# Altium PCB RT_SUPER_MK90.PCBdoc (part 2 of 3)
Units mil, origin at the board's own origin, x right, y up, seen from the top; angles counter-clockwise.
Board outline 1499.94 x 1499.94 mil, 4 copper layers (Top Layer, GND, PWR, Bottom Layer), stack 39.556 mil thick; 179 components, 119 nets, 506 pads, 207 vias.
Unrouted connection lines stored in the file: 7.
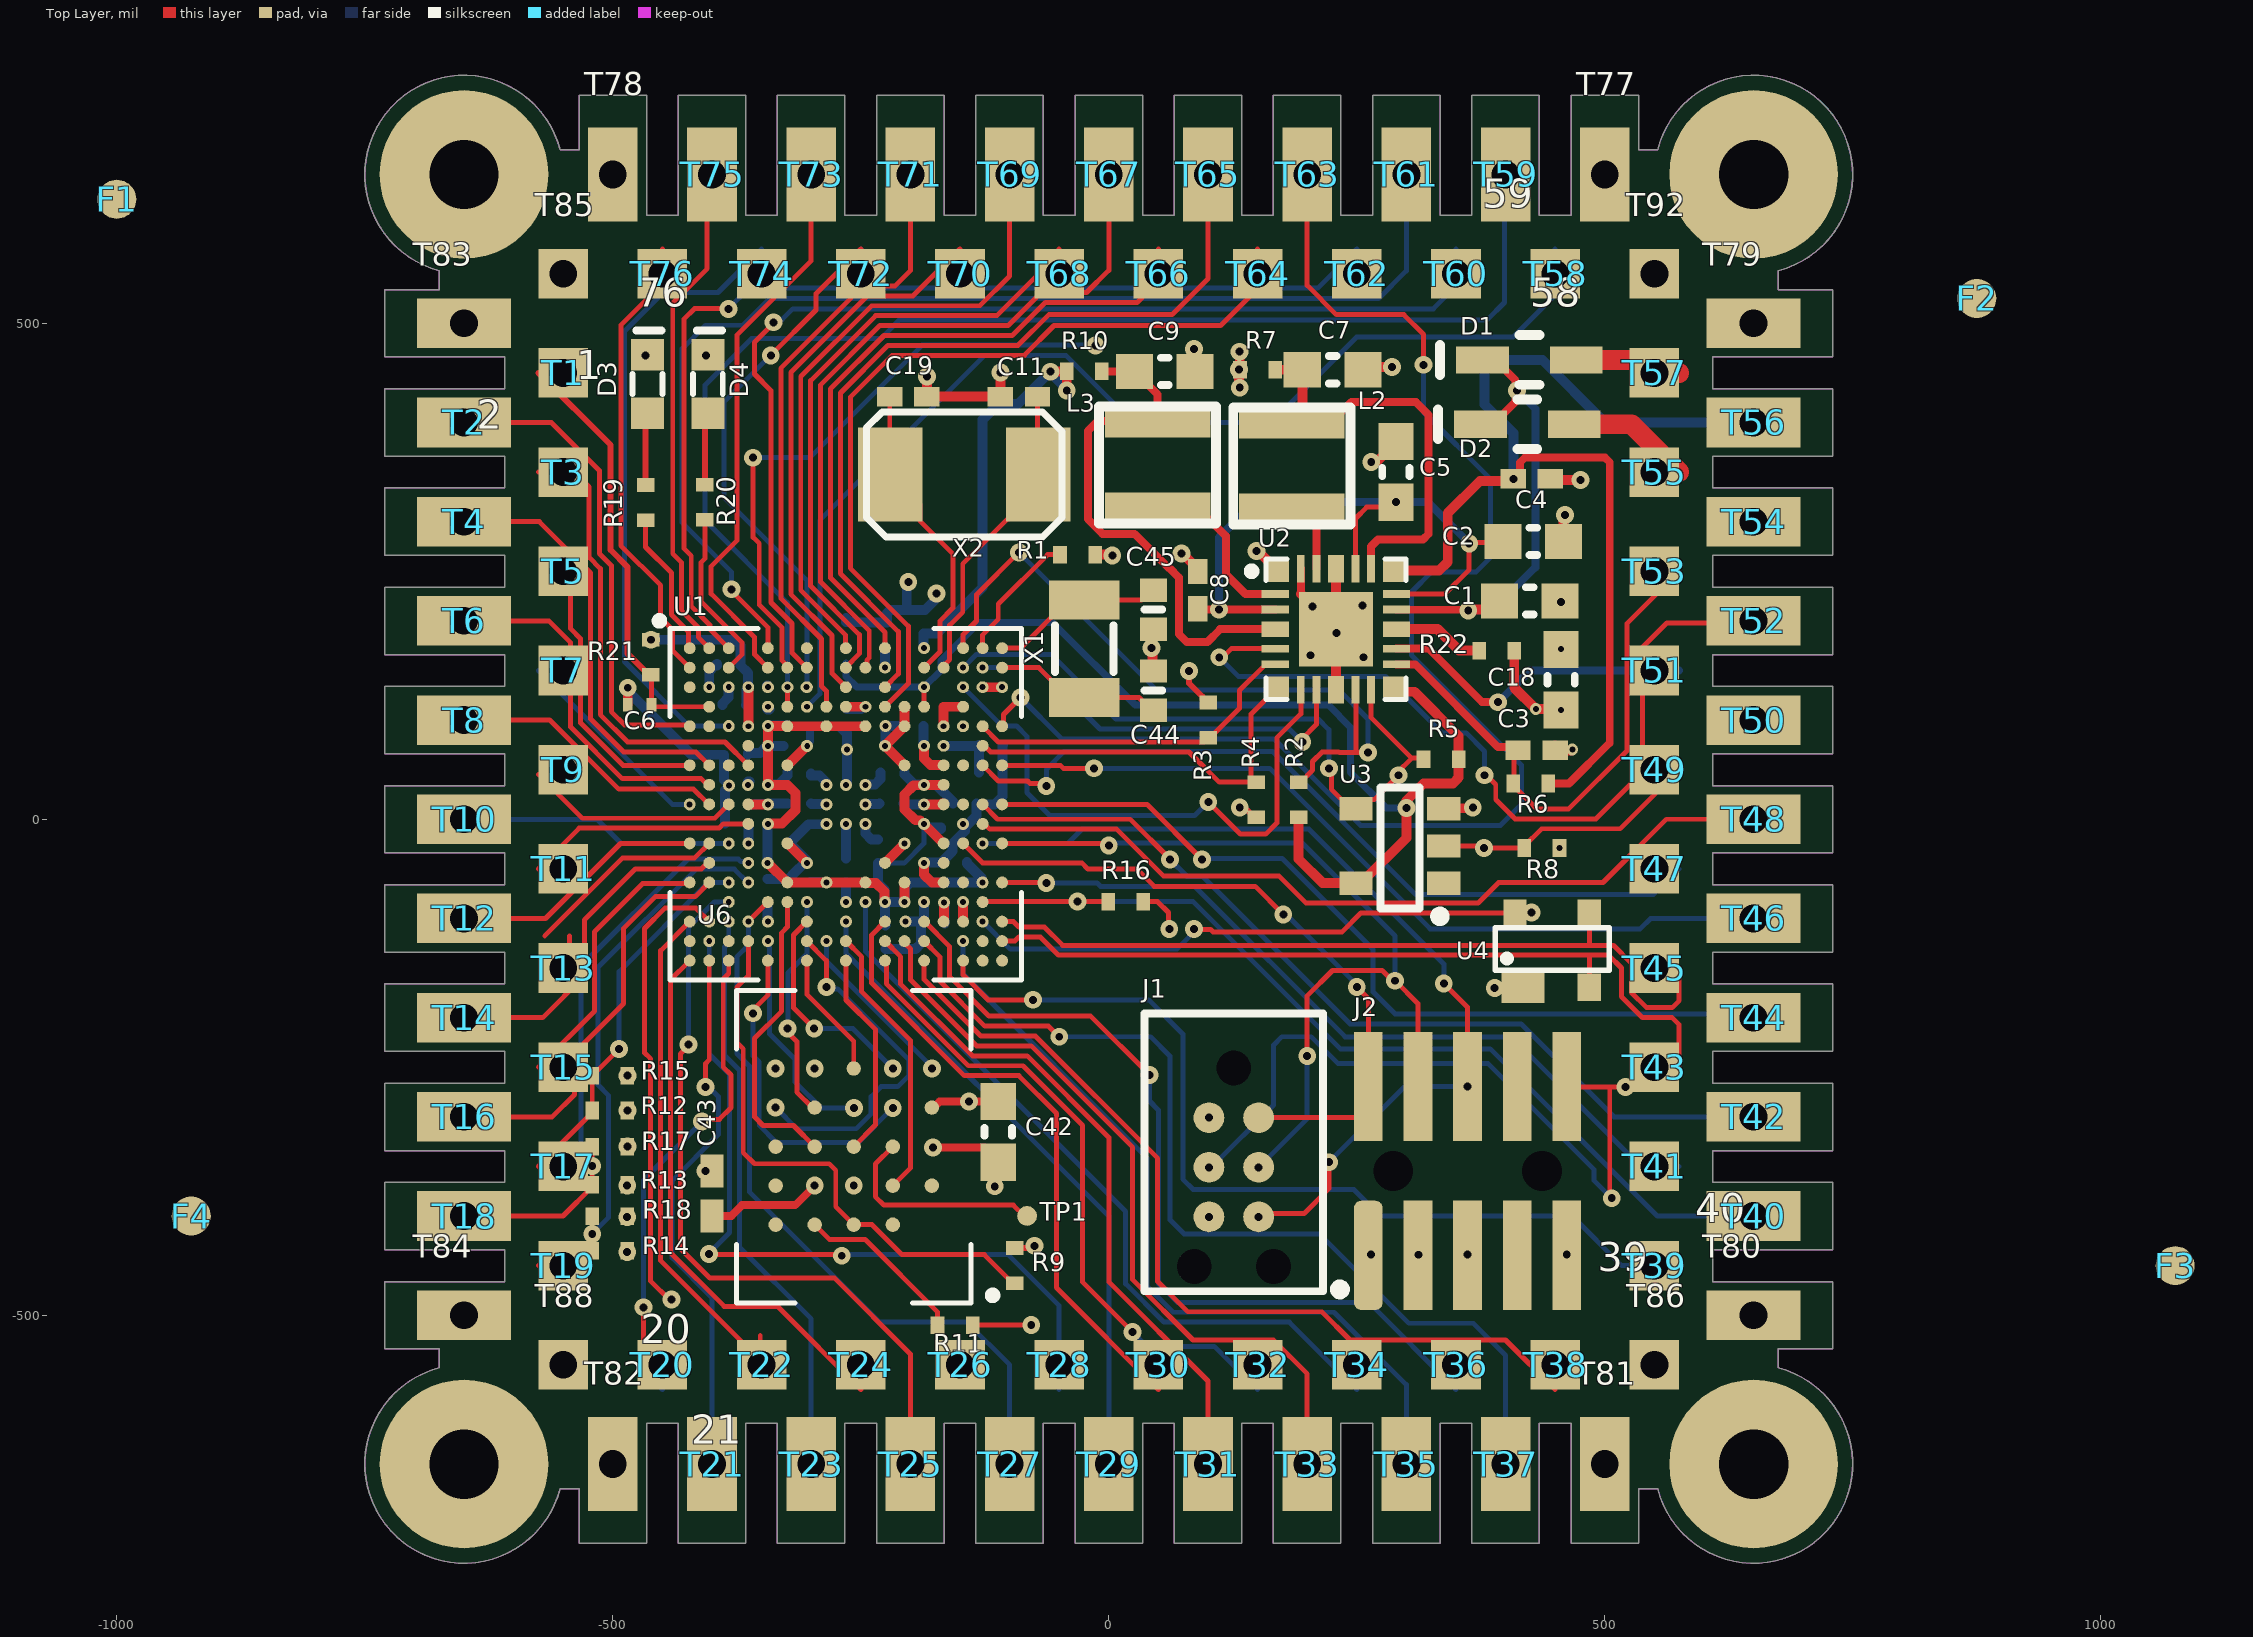
[diagram p0: Top Layer view]

## Via types
v1: diameter 18, hole 8, Top Layer to Bottom Layer, tented both sides, 124 vias
v2: diameter 12, hole 6, Top Layer to Bottom Layer, tented both sides, 83 vias

## Nets (pads, with @x,y where several pads share a name; then routed paths per layer and width w, separated by ;. In a path a pad name is that pad's centre, name@x,y a point inside that pad or via, vN(x,y) a via of type N, cw(c..) or ccw(c..) an arc to the next point about the centre after c; other vN are vias at no path point) (continued)
+1v8: (continued)
  Top Layer w10: v2(-363.43,93.74) v2(-363.43,133.11) ; v2(-186.26,74.06) -186.26,61.18 -179.83,54.75 -166.96,54.75 U1.G14@-166.57,54.37 ; U1.R15@-146.89,-101.39 v2(-146.89,-83.43) ; v2(-127.2,133.11) v2(-107.52,133.11) ; v1(-58.68,451.18) -58.5,451.35 -42.56,451.35 R10.2@-42.38,451.53 v1(-42.38,432.11)
  PWR w10: v2(-363.43,-24.37) -363.81,-23.99 -363.81,-11.19 -370,-5 -393.64,-5 -422,-33.36 -422,-129 -407,-144 -190.84,-144 -147.27,-100.43 -147.27,-83.81 v2(-146.89,-83.43) -146.89,-50.89 -138,-42 -106.86,-42 -101,-36.14 -101,47.85 v2(-146.89,93.74) -146.89,113.43 -145.91,114.41 ; v2(-363.43,133.11) v2(-363.43,93.74) -363.43,67.43 -350,54 -206.31,54 v2(-186.26,74.06) -186,74.31 -186,112.18 -188.23,114.41 ; v2(-186.26,172.48) -220.14,172.48 -225.25,167.38 -225.25,153.18 v2(-225.63,152.8) -225.25,152.41 -225.25,137.65 -202.01,114.41 -188.23,114.41 ; v2(-107.52,133.11) v2(-127.2,133.11) -127.2,120.27 -133.06,114.41 -145.91,114.41 ; -188.23,114.41 -145.91,114.41
  Bottom Layer w10: v1(-461.64,180.98) -376.97,180.98 -371.11,175.12 -371.11,154.92 -363.81,147.62 -363.81,133.49 v2(-363.43,133.11) -363.43,132.57 -365.51,130.48 -365.51,115.08 C39.2@-365.59,115 ; v2@-363.97,-24.37 v2(-363.43,-24.37) -363.08,-24.03 -363.08,-3.92 C40.2@-363,-3.84 ; v2@-225.53,152.89 v2(-225.63,152.8) -225.63,174.1 -225.55,174.18 C36.2@-225.43,174.18 ; C41.2@-187,94 -187,75.34 -186.26,74.6 v2(-186.26,74.06) ; C37.2@-187,187.06 -173.62,187.06 -127.2,233.47 -127.2,402.8 -111.45,418.55 -91.66,418.55 -58.68,451.53 -58.68,449.97 -42.38,433.67 v1(-42.38,432.11) ; C37.2@-186.7,187.06 -186.62,186.98 -186.62,173.35 v2@-186,172.74
+1v8_AO: C10.2 R2.2 R5.2 U1.C13 U1.D13 U2.12 U3.5 | length 1146.1
  Top Layer w5: U1.D13@-186.26,113.43 v2(-186.26,133.11)
  Top Layer w10: R2.2@191.38,2.01 191.38,-40.14 215.62,-64.38 U3.5@249.14,-64.38 254.35,-64.38 300,-18.73 v1(300,11.37) 300,18.78 317.25,36.02 346.82,36.02 352.68,41.88 R5.2@352.68,60.41 352.68,84 308.19,128.5 292.09,128.5 U2.12@288.03,132.56
  Bottom Layer w7: C10.2@-265,157.72 -265,144 -254.11,133.11 v2(-186.26,133.11) -169.2,150.17 -169.2,160.12 -131.06,198.26 -56.62,198.26 26.64,115 221.41,115 243.81,92.59 243.81,47.25 279.69,11.37 v1(300,11.37)
+3v3: C12.2 C13.2 C14.2 C15.2 C16.2 C17.2 C18.2 C20.2 C21.2 C22.2 C23.2 C24.2 C25.2 C42.1 C43.1 J1.1 J2.1 R3.2 R4.2 R8.2 R9.2 R12.2 R13.2 R14.2 R22.2 T50.1 U1.E6 U1.E8 U1.E10 U1.H13 U1.H14 U1.K13 U1.L14 U1.N12 U1.N16 U1.P11 U1.P12 U6.B4 U6.D1 U6.E4 | length 1450.7
  Top Layer w6: R9.2@-94.72,-432.28 -77.28,-432.28 v1(-75,-430) ; v1(80.91,149.45) 80.91,137.12 94.46,123.57 94.46,121.61 98.35,117.72 R3.2@100.31,117.72 ; v1(132,12) 134.3,9.7 139.09,9.7 146.78,2.01 R4.2@148.74,2.01
  Top Layer w8: v1(-485.5,-436.25) -485.28,-436.04 R14.2@-485.28,-435 ; v1(-485.5,-369.37) -485.28,-369.15 R13.2@-485.28,-368.52 ; C43.1@-400,-399.85 -380.53,-399.85 -369.67,-389 -316.13,-389 v1(-296.5,-369.37) ; U6.D1@-178.39,-290.63 -176.61,-290.63 -170.68,-284.7 v1(-141.07,-284.7) C42.1@-111.46,-284.7 ; J2.1@261.67,-439.58 262.33,-438.91 v1(264.41,-438.91)
  Top Layer w10: v2(-344,-44) -343.8,-44 -343.74,-44.06 -324.06,-63.74 v2(-284.68,-63.74) -245.31,-63.74 -244.93,-64.12 -234.88,-64.12 -226.01,-72.99 -226.01,-83.04 v2(-225.63,-83.43) ; v2(-343.74,-4.69) -343.36,-4.3 -329.3,-4.3 -316,9 -316,26.63 -324.06,34.68 v2(-343.74,34.68) v2(-343.74,74.06) v2(-343.74,94.12) -324.44,94.12 U1.E6@-324.06,93.74 U1.E8@-284.68,93.74 U1.E10@-245.31,93.74 ; v2(-205.94,-83.43) U1.N12@-205.94,-63.74 ; U1.K13@-190.49,-1 -194.94,-1 -205.94,10 -205.94,25.06 -196.7,34.3 -186.64,34.3 v2(-186.26,34.68) U1.H14@-166.57,34.68 ; v2(-186.26,-4.69) U1.L14@-166.57,-24.37 ; R22.2@408.72,170 408.72,132.59 429.99,111.33 v2(430.45,111.33) ; v2@434.78,111.33 454.69,111.33 v2(456,110.02)
  PWR w50: T50.1@603.89,101.11 605,100 T50.1@675,100
  Bottom Layer w5: C15.2@-232.52,-44.24 -206.25,-44.24 -186.26,-24.26 v2(-186.26,-4.69)
  Bottom Layer w10: C16.2@-364,65 -364,66.81 -363.92,66.89 -351.45,66.89 -344.28,74.06 v2(-343.74,74.06) ; v2(-344,-44) C20.2@-344,-24 -343.92,-23.92 -343.92,-4.87 v2(-343.74,-4.69) ; v2(-343.74,34.68) -343.36,35.07 -333.12,35.07 -324,44.19 C21.2@-324,46 -324,47.81 C21.2@-324.08,47.89 ; v2(-343.74,94.12) -343.36,94.51 -324.59,94.51 -324.51,94.58 C17.2@-324.51,95.12 ; v2(-343.74,74.06) C13.2@-328.03,74.03 ; C24.2@-300,-63 -300,-63.29 -299.92,-63.37 -285.06,-63.37 v2(-284.68,-63.74) ; C15.2@-232.52,-44.24 -232.52,-64.32 -226.01,-70.83 -226.01,-83.04 v2(-225.63,-83.43) ; C12.2@-225,-107 -225.63,-106.37 v2(-225.63,-83.43) ; C22.2@-206,47 -206,45.19 -195.88,35.07 -186.64,35.07 v2(-186.26,34.68) -185.88,34.3 -173.61,34.3 -157.12,17.81 C25.2@-157.12,16 ; v2(-186.26,-4.69) -185.72,-4.69 -182.29,-8.11 -169.2,-8.11 -169.12,-8.19 C23.2@-169.12,-10 ; C14.2@-142.76,-43.07 -142.76,-44.88 -127.59,-60.06 -127.59,-63.36 v2(-127.2,-63.74) -200.09,-63.74 -205.56,-69.22 -205.56,-83.04 v2(-205.94,-83.43) v2(-225.63,-83.43)
  other v1: 101,-300.85 -485.28,-293.61 -296.5,-251.26
  other v2: 454.38,-28.95
+5vUSB: D2.1 T55.1 U1.R16 U4.4 | length 1215.6
  Top Layer w5: v1(86,-110.57) 86.38,-110.96 102.5,-110.96 105,-113.46 235.17,-113.46 254.06,-94.56 U4.4@409.5,-94.56 425.44,-94.56 v1(426,-94)
  Top Layer w20: D2.1@469.12,398.21 526.79,398.21 575,350
  PWR w5: v1(426,-94) 508.52,-11.48 508.52,283.52 575,350
  Bottom Layer w5: v2(-127.2,-103.11) -127.03,-103.11 -99.24,-130.9 68.56,-130.9 86,-113.46 v1(86,-110.57)
+VBATT: C4.2 R6.2 T56.1 U2.18 | length 1114.7
  Top Layer w8: v1(407.78,343.11) 410.73,343.11 414.69,347.07 414.69,359.81 419.37,364.49 500.31,364.49 505,359.81 505,77.04 463.97,36.01 R6.2@443.04,36.01
  Top Layer w10: U2.18@288.03,250.67 332.89,250.67 341.66,259.43 341.66,308.58 374.07,340.99 405.65,340.99 v1(407.78,343.11)
  Bottom Layer w10: v1(407.78,343.11) 407.78,389.28 378.8,418.25 378.8,457.08 384.66,462.94 437.06,462.94 500,400 T56.1@675,400
+VBATT_BU: C3.2 R6.1 T53.1 U2.13 | length 539.7
  Top Layer w5: C3.2@408.59,67.87 408.59,36.99 R6.1@407.6,36.01 407.6,34.04 431.22,10.42 463.56,10.42 522.49,69.35 522.49,197.49 575,250
  Top Layer w8: U2.13@290,156.18 308.9,156.18 392.41,72.66 403.73,72.66 405.84,70.55 C3.2@405.84,67.87
+VIN: D1.1 T57.1 | length 109.1
  Top Layer w20: D1.1@471.24,463 553.88,463 566.88,450 575,450
+VREF: C6.2 R21.2 T1.1 U1.D2 | length 442
  Top Layer w5: R21.2@-461.64,145.55 -460.96,144.86 C6.2@-460.96,115.39 -458.99,113.43 U1.D2@-402.8,113.43
  Top Layer w6: T1.1@-575,450 -502.38,377.38 -502.38,271.51 -485.28,254.42 -485.28,167.22 -463.61,145.55 R21.2@-461.64,145.55
ADC0_1: T74.1 U1.E3 | length 637.4
  Bottom Layer w5: v2(-383.11,93.89) -422.96,93.89 -488.17,159.09 -488.17,491.83 -449,531 -394,531 -350,575